# EAGLE board I2C teplomer (EAGLE 5.06)
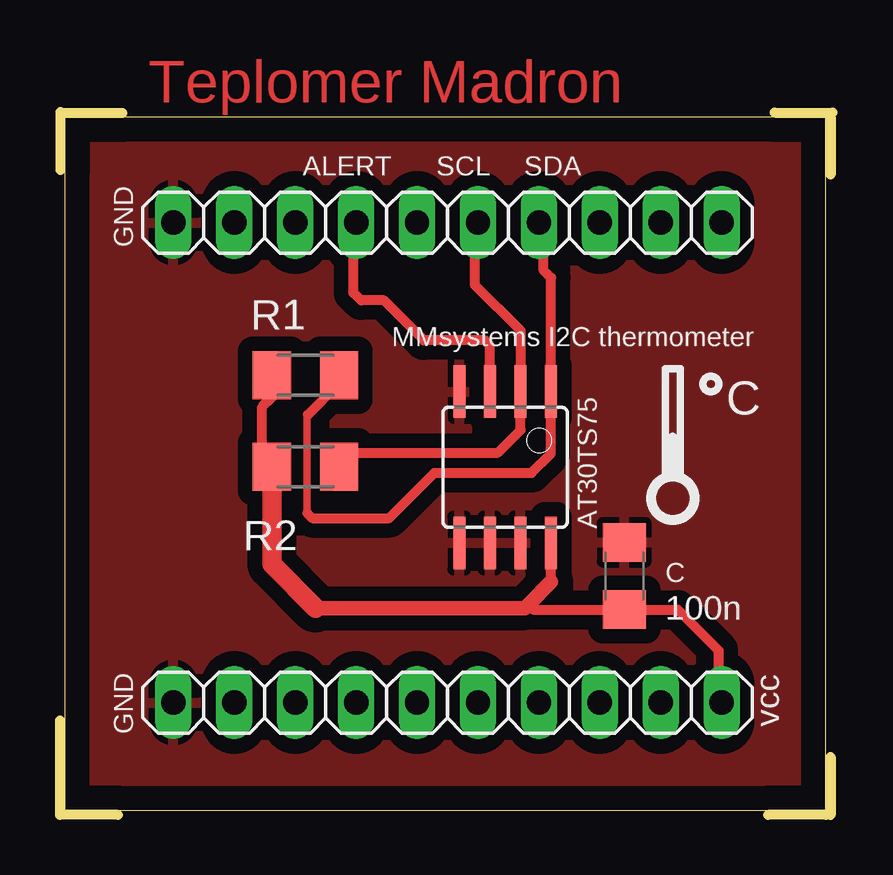
[diagram p0: board, top side]

Size 32.21 x 29.28 mm. Coordinates in mm from the lower left corner, seen from the top.
Outline: 0.19,0.19 0.22,0.19
Outline: 0.22,0.19 31.92,0.19 31.92,29.07 0.19,29.07
Outline: 0.22,0.19 0.22,29.07
Outline: 2.41,0 0,0 0,3.94
Outline: 31.94,0 29.53,0
Outline: 32.13,2.41 32.13,0
Outline: 32.13,29.08 32.13,26.67
Outline: 29.8,29.26 32.21,29.26
Outline: 0.2,29.24 2.61,29.24
Outline: 0.03,26.87 0.03,29.28
Copper layers (1*16): Top 0.035mm / dielectric 1.5mm / Bottom 0.035mm
Design rules "default": minimum track width 10mil, minimum drill 24mil, track to track 8mil, track to pad 8mil, pad to pad 8mil, via to via 8mil, smd to smd 8mil, copper to edge 40mil, drill to drill 8mil, minimum pad ring 10mil, minimum via ring 8mil, stop-mask expansion 4mil, vias tented up to drill 0mil, thermal gap 10mil

## Footprints (pad centres in the part's own frame; a part is rotated, then mirrored left to right if it is on the bottom)
C1206 = smd 1.6 x 1.8: 1 -1.4,0; 2 1.4,0
MMSYSTEMS_CON = drill 1.016 long: 1 2,1; 2 4.54,1; 3 7.08,1; 4 9.62,1; 5 12.16,1; 6 14.7,1; 7 17.24,1; 8 19.78,1; 9 22.32,1; 10 24.86,1; 11 2,21; 12 4.54,21; 13 7.08,21; 14 9.62,21; 15 12.16,21; 16 14.7,21; 17 17.24,21; 18 19.78,21; 19 22.32,21; 20 24.86,21
M1206 = smd 1.6 x 2: 1 -1.4,0; 2 1.4,0
SOIC8 = smd 0.5 x 2.2: 1 -1.905,-3.154; 2 -0.645,-3.154; 3 0.625,-3.154; 4 1.895,-3.154; 5 1.905,3.154; 6 0.635,3.154; 7 -0.635,3.154; 8 -1.905,3.154

## Placement (x,y rotation side)
C1  100n  [C1206]  23.53,9.95 90 top
MM1  MMSYS_CONECTOR  [MMSYSTEMS_CON]  2.73,3.68 0 top
R1  4k7  [M1206]  10.24,18.31 180 top
R2  4k7  [M1206]  10.24,14.5 180 top
U$1  ATMEL_TEMP_SENSOR_AT30TS75  [SOIC8]  18.56,14.48 180 top

## Library data of the parts
C1 R1 R2 = resistor
MM1 = atmega16u4
U$1 = AT30TS75

## Nets
GND: C1.2 MM1.1 MM1.11 U$1.4 U$1.5 U$1.6 U$1.7
N$1: MM1.17 R1.1 U$1.1
N$2: MM1.16 R2.1 U$1.2
N$3: MM1.14 U$1.3
VCC: C1.1 MM1.10 R1.2 R2.2 U$1.8

## Tracks (layer width: path | path; a pad name or v marks a point on that pad's centre or on a via)
GND
  pour Top (isolate 0.61): -1.71,29.99 33.79,29.99 33.79,-1.39 -1.71,-1.39
N$1
  Top 0.305: 10.31,12.58 10.31,16.65 10.33,16.68
  Top 0.406: 10.31,12.58 10.52,12.37 13.72,12.37 15.6,14.25 19.66,14.25 20.47,15.05 U$1.1 20.48,17.65 20.48,22.38 20.16,22.7 20.16,24.48 MM1.17 | 10.33,16.68 11.64,17.98
  Top 0.813: 11.64,17.98 R1.1
N$2
  Top 0.406: 11.91,14.77 R2.1 11.92,14.78 11.92,15.09 18.26,15.09 19.21,16.04 19.21,16.05 U$1.2 19.21,20.16 17.31,22.06 17.31,24.56 MM1.16
N$3
  Top 0.406: U$1.3 17.93,17.64 17.93,19.56 17.72,19.77 15.17,19.77 13.5,21.43 12.55,21.43 12.24,21.75 12.24,24.57 MM1.14
VCC
  Top 0.406: R1.2 8.84,17.39 8.43,16.99 8.43,14.9 | 20.48,9.7 U$1.8 | 19.53,8.75 19.73,8.55 C1.1 25.75,8.55 27.45,6.85 27.45,4.81 MM1.10
  Top 0.61: 10.65,8.62 19.39,8.62 19.53,8.75 20.48,9.7
  Top 0.813: 8.43,14.9 R2.2 8.84,10.43 10.65,8.62

## Text on the board
Top: Teplomer Madron
tNames: ALERT | SCL | SDA | GND | MMsystems I2C thermometer | C | AT30TS75 | C | 100n | GND | vcc